# Altium PCB CR-10 Motherboard.PcbDoc (part 1 of 14)
Units mil, origin at the board's own origin, x right, y up, seen from the top; angles counter-clockwise.
Board outline 3970.48 x 2769.68 mil, 2 copper layers (TopLayer, BottomLayer); 147 components, 128 nets, 667 pads, 614 vias.
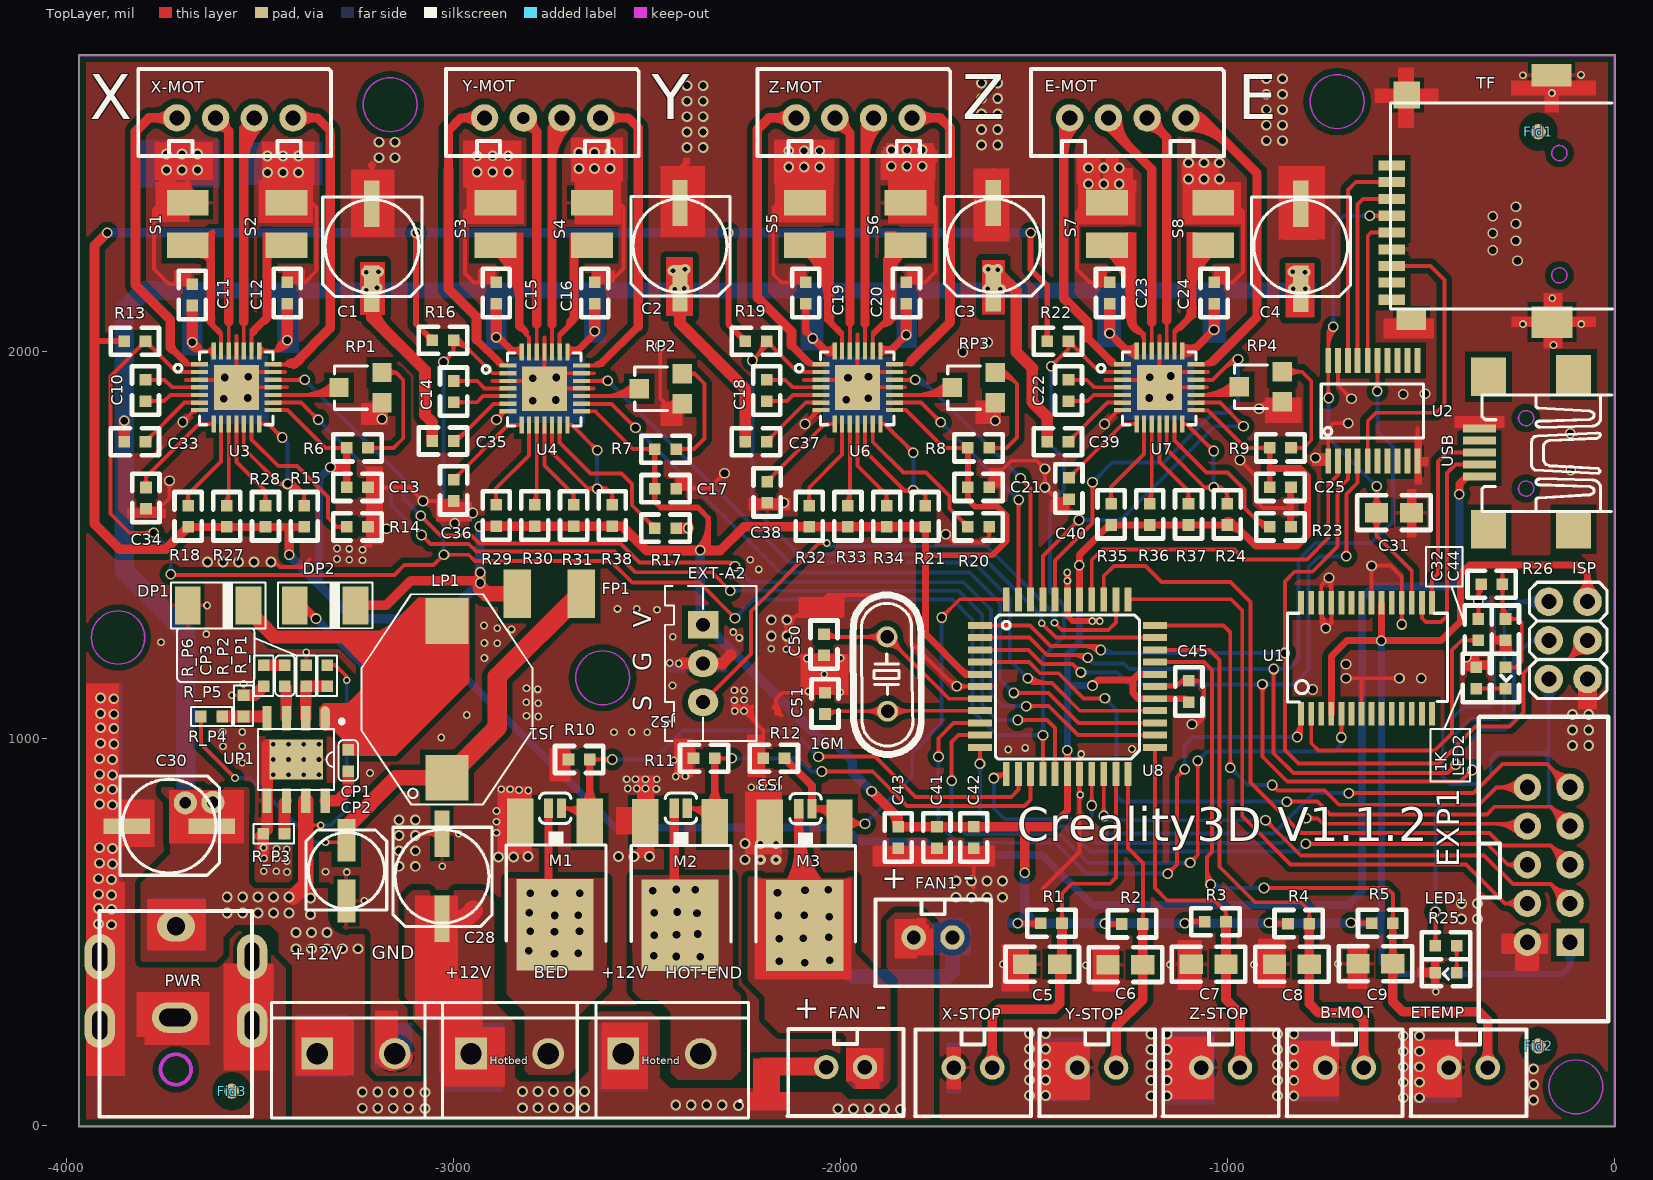
[diagram p0: TopLayer view]
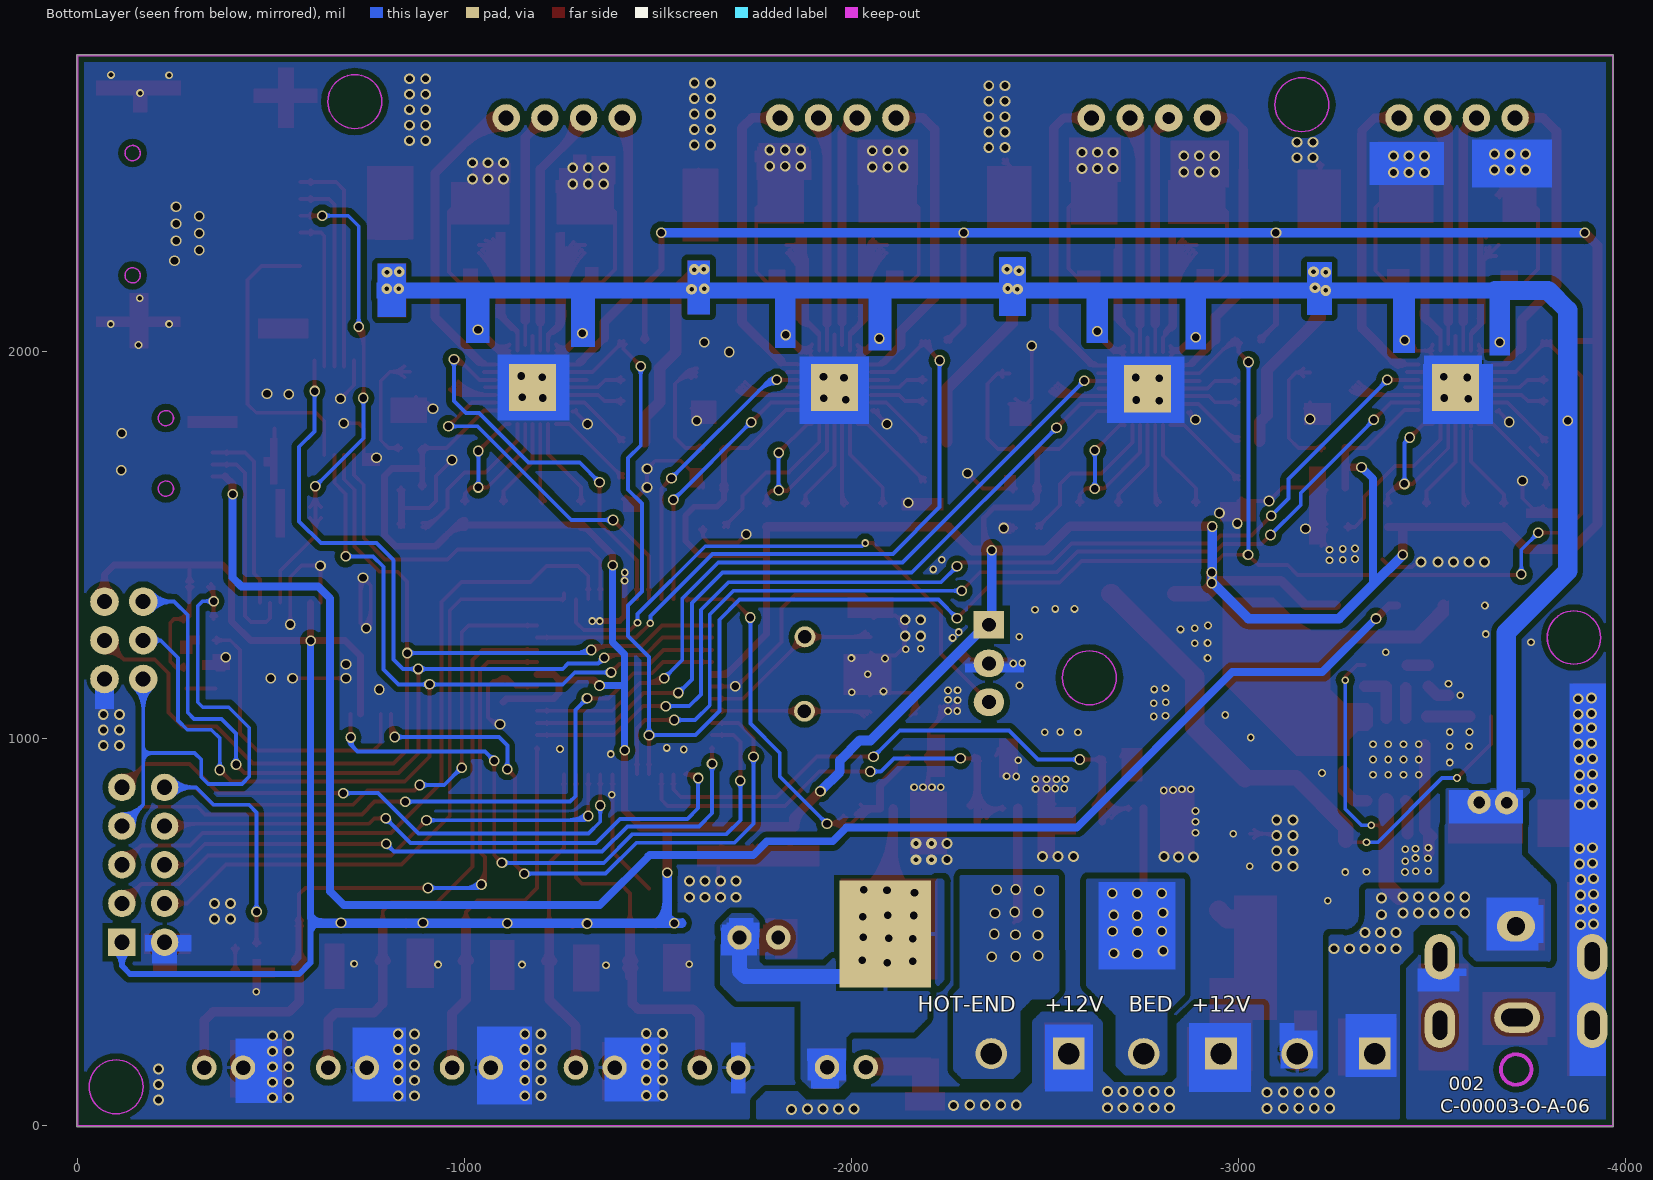
[diagram p1: BottomLayer view, seen from below]

## Layer stack, top to bottom
TopSolder: solder mask 0.4, Solder Resist, Dk 3.5
TopLayer: signal copper 1.4
Dielectric1: dielectric 12.6, FR-4, Dk 4.8
BottomLayer: signal copper 1.4
BottomSolder: solder mask 0.4, Solder Resist, Dk 3.5

## Board outline
-3968.51,-1.97 1.97,-1.97 1.97,2767.72 -3968.51,2767.72

## Design rules (kind name [scope] priority, off if disabled: settings)
Clearance Clearance_4 [InPolygon] p1: gap=15 ignorepadtopadclearanceinfootprint=FALSE except(0: Arc-Hole Track-Hole SMDPad-Hole THPad-Hole Via-Hole Fill-Hole Poly-Hole Region-Hole Text-Hole)
Clearance Clearance_3 [InPolygon vs (InPadClass('All Pads'))] p2: gap=15 ignorepadtopadclearanceinfootprint=FALSE except(0: Arc-Hole Track-Hole SMDPad-Hole THPad-Hole Via-Hole Fill-Hole Poly-Hole Region-Hole Text-Hole)
Clearance Clearance_2 [InPolygon vs OnLayer('KeepOutLayer')] p3: gap=15 ignorepadtopadclearanceinfootprint=FALSE except(0: Arc-Hole Track-Hole SMDPad-Hole THPad-Hole Via-Hole Fill-Hole Poly-Hole Region-Hole Text-Hole)
Clearance Clearance_1 [InPolygon vs (OnLayer('BottomLayer') AND OnLayer('TopLayer'))] p4: gap=15 ignorepadtopadclearanceinfootprint=FALSE except(0: Arc-Hole Track-Hole SMDPad-Hole THPad-Hole Via-Hole Fill-Hole Poly-Hole Region-Hole Text-Hole)
Clearance [All] p5: gap=6 ignorepadtopadclearanceinfootprint=FALSE except(0: Arc-Hole Track-Hole SMDPad-Hole THPad-Hole Via-Hole Fill-Hole Poly-Hole Region-Hole Text-Hole)
ComponentClearance [All] p1 off: gap=10 collisioncheckmode=3 verticalgap=10 showdistances=FALSE
FabricationTestPointUsage TestPointUsage [All] p1: valid=0 allowmultiple=FALSE
FabricationTestpoint Testpoint [All] p1: side=3 testpointundercomponent=TRUE minsize=40 maxsize=100 preferedsize=60 minholesize=20 maxholesize=40 preferedholesize=32 testpointgrid=1 allowsidetop=TRUE allowsidebottom=TRUE usegrid=TRUE gridtolerance=0.01
HoleToHoleClearance [All] p1: gap=0 allowstackedmicrovias=TRUE
MinimumSolderMaskSliver [All] p1: minsoldermaskwidth=6
PolygonConnect PolygonConnect_2 [(InNet('NetHotbed_1') OR InNet('NetHotend_1'))] p1: connectstyle=Direct reliefconductorwidth=10 reliefentries=4 polygonreliefangle="90 Angle" airgapwidth=10
PolygonConnect PolygonConnect_1 [All vs (InPadClass('All Pads'))] p2: connectstyle=Relief reliefconductorwidth=10 reliefentries=4 polygonreliefangle="90 Angle" airgapwidth=10
PolygonConnect [All] p3: connectstyle=Direct reliefconductorwidth=10 reliefentries=4 polygonreliefangle="90 Angle" airgapwidth=10
RoutingVias [All] p1: holewidth=28 width=50 viastyle="Through Hole" minholewidth=28 minwidth=50 maxholewidth=28 maxwidth=50
SilkToSilkClearance [All] p1: silktosilkclearance=0
SilkToSolderMaskClearance SilkscreenOverComponentPads [IsPad] p1: minsilkscreentomaskgap=0 clearancetoexposedcopper=TRUE
SolderMaskExpansion [All] p1: expansion=4
Width [All] p1: maxlimit=100 minlimit=6 preferedwidth=10 minimp=50.000000 maximp=50.000000 favimp=50.000000
23 further rules are at their usual default settings.

## Components (designator, comment, footprint, x,y, rotation, side; value= is the part's Value field where it differs from the comment)
1K "R1-1" 0603 -356.54,1129.84 r90 top (schematic designator 1k)
16M "16Mhz" CRY -1879.54,1263.84 r225 top
B-MOT "XH2.54-2A" P2#1 -647.54,150.84 r180 top
C1 "100uF" CAP-100 -3210.62,2382.88 r180 top
C2 "100uF" CAP-100 -2414.54,2384.84 r180 top
C3 "100uF" CAP-100 -1604.54,2384.84 r180 top
C4 "100uF" CAP-100 -810.62,2382.88 r180 top
C5 "4.7uF" 0805 -1433.54,417.84 r180 top
C6 "4.7uF" 0805 -1218.54,416.84 r180 top
C7 "4.7uF" 0805 -1003.54,417.84 r180 top
C8 "4.7uF" 0805 -788.54,417.84 r180 top
C9 "4.7uF" 0805 -572.54,418.84 r180 top
C10 "100nF" 0603 -3795.62,1927.88 r270 top
C11 "100nF" 0603 -3674.54,2174.84 r270 top
C12 "100nF" 0603 -3429.54,2124.84 r90 top
C13 "100nF" 0603 -3275.62,1649.88 r0 top
C14 "100nF" 0603 -2999.54,1924.84 r270 top
C15 "100nF" 0603 -2889.54,2179.84 r270 top
C16 "100nF" 0603 -2634.54,2124.84 r90 top
C17 "100nF" 0603 -2479.54,1646.84 r0 top
C18 "100nF" 0603 -2190.62,1927.88 r270 top
C19 "100nF" 0603 -2089.54,2179.84 r270 top
C20 "100nF" 0603 -1829.54,2124.84 r90 top
C21 "100nF" 0603 -1670.62,1649.88 r0 top
C22 "100nF" 0603 -1410.62,1927.88 r270 top
C23 "100nF" 0603 -1304.54,2179.84 r270 top
C24 "100nF" 0603 -1034.54,2124.84 r90 top
C25 "220nF" 0603 -890.62,1649.88 r0 top
C28 "100uF" CAP-100 -3029.54,754.84 r180 top
C30 "100uF" CAP-100 -3844.54,774.84 r270 top
C31 "100nF" 0805 -614.54,1584.84 r0 top
C32 "100nF" 0603 -351.54,1254.84 r90 top
C33 "100nF" 0603 -3795.62,1767.88 r180 top
C34 "100nF" 0603 -3794.45,1649.8 r270 top
C35 "100nF" 0603 -2999.54,1769.84 r180 top
C36 "100nF" 0603 -2999.54,1669.84 r270 top
C37 "100nF" 0603 -2190.62,1767.88 r180 top
C38 "100nF" 0603 -2189.54,1664.84 r270 top
C39 "100nF" 0603 -1410.62,1767.88 r180 top
C40 "220nF" 0603 -1409.45,1674.8 r270 top
C41 "1uF" 0603 -1750.54,772.84 r270 top
C42 "1uF" 0603 -1655.54,772.84 r270 top
C43 "100nF" 0603 -1850.54,772.84 r270 top
C44 "100nF" 0603 -281.54,1309.84 r270 top
C45 "330nF" 0603 -1099.54,1094.84 r90 top
C50 "22p" 0603 -2042.46,1270.91 r270 top
C51 "22p" 0603 -2039.8,1064.44 r90 top
CP1 "0.1uF" C0603 -3271.54,916.84 r90 top
CP2 "22uF" RVT4X5.5 -3276.54,659.84 r270 top
CP3 "150pF" C0603 -3435.54,1190.84 r270 top
DP1 "B340A-13-F" D-SMA -3686.54,1344.84 r0 top
DP2 "SS12" D-SMA -3410,1345 r0 top
E-MOT "XH2.54-4A" P4#1 -1407.49,2604.84 r0 top
ETEMP "XH2.54-2A" P2#1 -327.54,150.84 r180 top
EXP1 "Header 2x5" SOP10 -114.54,474.84 r90 top
EXT-A2 "XH2.54-3A" XH-3A -2355,1295 r0 top
FAN "XH2.54-2A" P2#1 -1936.54,151.84 r180 top
FAN1 "XH2.54-2A" P2#2 -1710.54,486.84 r180 top
Fid1 "Fiducial" Fiducial-A#1 -196.85,2568.9 r90 top
Fid2 "Fiducial" Fiducial-A#2 -246.54,304.84 r90 top
Fid3 "Fiducial" Fiducial-A#1 -3572.83,89.84 r90 top
FP1 "1.5A" MF-MSMF050 -2670,1375 r180 top
Hotbed "HP128-5.0-2P" MOT-2 -2754.69,186.84 r180 top locked
Hotend "HP128-5.0-2P" MOT-2 -2360.98,186.84 r180 top locked
ISP "HEADER 3X2" H6 -169.54,1154.84 r90 top
JS1 "not populated" R10 -2754.54,819.84 r180 top
JS2 "not populated" R10 -2429.54,819.84 r180 top
JS3 "not populated" R10 -2107.54,818.84 r180 top
LED1 "blue" 0603 -462.54,465.84 r0 top
LED2 "blue" 0603 -281.54,1129.84 r90 top
LP1 "功率电感-15uH/3A" DO3316P -3016.54,899.84 r90 top locked
M1 "REP30N06LE" TO-252 -2827.54,785.84 r180 top
M2 "REP30N06LE" TO-252 -2504.54,784.84 r180 top
M3 "REP30N06LE" TO-252 -2182.54,783.84 r180 top
PWR "HP128-5.0-2P" MOT-2 -3151.54,186.84 r180 top
R1 "10k" 0603 -1427.54,523.84 r180 top
R2 "10k" 0603 -1218.54,521.84 r180 top
R3 "10k" 0603 -1003.54,527.84 r180 top
R4 "4k7" 0603 -788.54,522.84 r180 top
R5 "4k7" 0603 -572.54,523.84 r180 top
R6 "23k7" 0603 -3220.62,1751.88 r180 top
R7 "23k7" 0603 -2424.54,1748.84 r180 top
R8 "33k" 0603 -1615.62,1751.88 r180 top
R9 "23k7" 0603 -835.62,1751.88 r180 top
R10 "10k" 0603 -2647.54,946.84 r180 top
R11 "10k" 0603 -2324.54,949.84 r180 top
R12 "10k" 0603 -2144.54,949.84 r180 top
R13 "100k" 0603 -3795.62,2027.88 r180 top
R14 "10k" 0603 -3275.62,1547.88 r0 top
R15 "10k" 0603 -3385.62,1602.88 r270 top
R16 "100k" 0603 -2999.54,2029.84 r180 top
R17 "10k" 0603 -2479.54,1544.84 r0 top
R18 "0R" 0603 -3685.62,1602.88 r270 top
R19 "100k" 0603 -2190.62,2027.88 r180 top
R20 "10k" 0603 -1670.62,1547.88 r0 top
R21 "10k" 0603 -1780.62,1602.88 r270 top
R22 "100k" 0603 -1410.62,2027.88 r180 top
R23 "10k" 0603 -890.62,1547.88 r0 top
R24 "10k" 0603 -1000.62,1607.88 r270 top
R25 "1k" 0603 -407.54,395.84 r180 top
R26 "1k" 0603 -344.54,1399.84 r0 top
R27 "0R" 0603 -3585.62,1602.88 r270 top
R28 "0R" 0603 -3485.62,1602.88 r270 top
R29 "0R" 0603 -2889.54,1604.84 r270 top
R30 "0R" 0603 -2789.54,1604.84 r270 top
R31 "0R" 0603 -2689.54,1604.84 r270 top
R32 "0R" 0603 -2080.62,1602.88 r270 top
R33 "0R" 0603 -1980.62,1602.88 r270 top
R34 "0R" 0603 -1880.62,1602.88 r270 top
R35 "0R" 0603 -1300.62,1607.88 r270 top
R36 "0R" 0603 -1200.62,1607.88 r270 top
R37 "0R" 0603 -1100.62,1607.88 r270 top
R38 "10k" 0603 -2589.54,1604.84 r270 top
R_P1 "100k" R0603 -3325.54,1190.84 r270 top
R_P2 "24.9k" R0603 -3380.54,1135.84 r90 top
R_P3 "100k" R0603 -3436.54,754.84 r180 top
R_P4 "210k" R0603 -3597.54,1057.84 r180 top
R_P5 "40.2k" R0603 -3542.54,1057.84 r90 top
R_P6 "100k" R0603 -3490.54,1190.84 r270 top
RP1 "10k" RP -3295.62,1907.88 r0 top
RP2 "10k" RP -2519.54,1904.84 r0 top
RP3 "10k" RP -1710.62,1907.88 r0 top
RP4 "10k" RP -969.54,1909.84 r0 top
S1 "0.1R" R100 -3684.54,2274.84 r180 top
S2 "0.1R" R100 -3429.54,2274.84 r180 top
S3 "0.1R" R100 -2889.54,2274.84 r180 top
S4 "0.1R" R100 -2639.54,2274.84 r180 top
S5 "0.1R" R100 -2089.54,2274.84 r180 top
S6 "0.1R" R100 -1829.54,2274.84 r180 top
S7 "0.1R" R100 -1309.54,2274.84 r180 top
S8 "0.1R" R100 -1034.54,2274.84 r180 top
TF "TF" TF -574.54,2134.84 r90 top
U1 "FT232RL" PL2303 -809.54,1064.84 r270 top
U2 "HC541" SSOP-20 -739.54,1734.84 r270 top
U3 "A4988" QFP28 -3655.62,1967.88 r0 top
U4 "A4988" QFP28 -2859.54,1964.84 r0 top
U6 "A4988" QFP28 -2050.62,1967.88 r0 top
U7 "A4988" QFP28 -1270.62,1967.88 r0 top
U8 "ATMEGA1284P-AU" QFP-44 -1638.54,1292.84 r180 top locked
UP1 "MP1584" SOIC8E -3406.54,946.84 r180 top
USB "mini-USB" USB -349.54,1739.84 r90 top
X-MOT "XH2.54-4A" P4#1 -3714.54,2604.84 r0 top
X-STOP "XH2.54-2A" P2#1 -1607.54,150.84 r180 top
Y-MOT "XH2.54-4A" P4#2 -2919.54,2604.84 r0 top
Y-STOP "XH2.54-2A" P2#1 -1287.54,150.84 r180 top
Z-MOT "XH2.54-4A" P4#1 -2114.54,2604.84 r0 top
Z-STOP "XH2.54-2A" P2#1 -967.54,150.84 r180 top

## Footprints (in the part's own frame and the unit in brackets; to place one, negate y for a bottom-side part, rotate by r counter-clockwise, add the part's x,y. Pads: shape width x height; smd on the part's side, far side on the other; paste and mask are expansions set on the pad)
0603 [mil]
  rect 30x30 smd: 1(0,0) 2(55,0)
  silkscreen extent -35,-35 90,35
0805 [mil]
  rect 60x50 smd: 1(0,0) 2(90,0)
  silkscreen extent -50,-45 140,45
C0603 [mil]
  rect 30x30 smd: 1(0,0) 2(55,0)
  silkscreen extent -25,-25 80,25
CAP-100 [mil]
  rect 40x120 smd: 1(0,220) 2(0,0)
  silkscreen extent -129,-17 127,240
CRY [mil]
  round 54 hole 35: 1(0,0) 2(135,137)
  silkscreen extent -101,-103 239,242
D-SMA [mm]
  rect 1.7x2.5 smd: 1(0,0) 2(4,0)
  silkscreen extent -1.1,-1.5 5.1,1.55
DO3316P [mm]
  rect 3x2.8 smd: 1(0,0) 2(10.29,0)
  silkscreen extent -1.75,-5.6 12.04,5.6
Fiducial-A#1 [mm]
  round 1 smd mask+0.75: ""(0,0)
  TopLayer pour cut-out: -1.25,0 -1.155,-0.478 -0.884,-0.884 -0.478,-1.155 0,-1.25 0,-1.25 0.478,-1.155 0.884,-0.884 1.155,-0.478 1.25,0 1.25,0 1.155,0.478 0.884,0.884 0.478,1.155 0,1.25 0,1.25 -0.478,1.155 -0.884,0.884 -1.155,0.478 -1.25,0
Fiducial-A#2 [mm]
  round 1 smd mask+0.75: ""(-2.493,-1.262)
  TopLayer pour cut-out: -3.743,-1.258 -3.648,-1.737 -3.377,-2.142 -2.972,-2.413 -2.493,-2.508 -2.493,-2.508 -2.015,-2.413 -1.61,-2.142 -1.339,-1.737 -1.243,-1.258 -1.243,-1.258 -1.339,-0.78 -1.61,-0.374 -2.015,-0.103 -2.493,-0.008 -2.493,-0.008 -2.972,-0.103 -3.377,-0.374 -3.648,-0.78 -3.743,-1.258
H6 [mil]
  round 74 hole 39: 1(200,0) 2(200,-100) 3(100,0) 4(100,-100) 5(0,0) 6(0,-100)
  silkscreen extent -50,-150 250,50
MF-MSMF050 [mm]
  rect 1.8x3.2 smd: 1(0,0) 2(4.2,0)
MOT-2 [mil]
  oval 82x80 hole 55: 1(0,0)
  rect 82x82 hole 55: 2(200,0)
  silkscreen extent -123,-132 319,166
P2#1 [mm]
  round 1.6 hole 0.95: 1(0,0) 2(2.54,0)
  silkscreen extent -2.54,-2.5 5.08,3.2
P2#2 [mm]
  round 1.6 hole 0.9: 1(0,0) 2(2.54,0)
  silkscreen extent -2.54,-2.5 5.08,3.2
P4#1 [mm]
  round 1.8 hole 0.991: 1(0,0) 2(2.54,0) 3(5.08,0) 4(7.62,0)
  silkscreen extent -2.54,-2.5 10.12,3.2
P4#2 [mm]
  round 1.8 hole 0.991: 1(0,0) 3(5.08,0) 4(7.62,0)
  round 1.8 hole 0.8: 2(2.54,0)
  silkscreen extent -2.54,-2.5 10.12,3.2
PL2303 [mil]
  rect 60x15 smd: 1(0,0) 2(0,26) 3(0,52) 4(0,78) 5(0,104) 6(0,130) 7(0,156) 8(0,182) 9(0,208) 10(0,234) 11(0,260) 12(0,286) 13(0,312) 14(0,338) 15(-287,338) 16(-287,312) 17(-287,286) 18(-287,260) 19(-287,234) 20(-287,208) 21(-287,182) 22(-287,156) 23(-287,130) 24(-287,104) 25(-287,78) 26(-287,52) 27(-287,26) 28(-287,0)
  silkscreen extent -260,-35 -31,378
QFP28 [mil]
  rect 116x116 / inner rect 116x116 / far side rect 122x122 all layers, no hole: 0(95,-60)
  rect 44x11 smd: 1(0,0) 2(0,-20) 3(0,-40) 4(0,-59) 5(0,-79) 6(0,-99) 7(0,-118) 15(190,-118) 16(190,-99) 17(190,-79) 18(190,-59) 19(190,-40) 20(190,-20) 21(190,0)
  rect 11x44 smd: 8(36,-154) 9(55,-154) 10(75,-154) 11(95,-154) 12(114,-154) 13(134,-154) 14(154,-154) 22(154,35) 23(134,35) 24(114,35) 25(95,35) 26(75,35) 27(55,35) 28(36,35)
  silkscreen extent -66,-156 189,32
QFP-44 [mil]
  rect 62x18 smd: 1(1,0) 2(1,31) 3(1,63) 4(1,94) 5(1,126) 6(1,157) 7(1,189) 8(1,220) 9(1,252) 10(1,283) 11(1,315) 23(-451,315) 24(-451,283) 25(-451,252) 26(-451,220) 27(-451,189) 28(-451,157) 29(-451,126) 30(-451,94) 31(-451,63) 32(-451,31) 33(-451,0)
  rect 18x62 smd: 12(-67,384) 13(-99,384) 14(-130,384) 15(-162,384) 16(-193,384) 17(-225,384) 18(-256,384) 19(-288,384) 20(-319,384) 21(-351,384) 22(-382,384) 34(-382,-68) 35(-351,-68) 36(-319,-68) 37(-288,-68) 38(-256,-68) 39(-225,-68) 40(-193,-68) 41(-162,-68) 42(-130,-68) 43(-99,-68) 44(-67,-68)
  silkscreen extent -411,-27 -39,345
R10 [mil]
  rect 24x50 smd: 1(-34,-1) 2(0,-1)
  silkscreen extent -58,-40 23,38
R100 [mil]
  rect 108x66 smd: 1(2,-1) 2(2,-111)
R0603 [mil]
  rect 30x30 smd: 1(0,0) 2(55,0)
  silkscreen extent -25,-25 80,25
RP [mil]
  rect 50x50 smd: 1(0,0) 2(111,-39) 3(111,39)
  silkscreen extent -12,-56 73,56
RVT4X5.5 [mm] "22uF  35V"
  rect 2.8x1.2 smd: 1(-2,0) 2(2,0)
  silkscreen extent -2.66,-2.65 2.6,2.65
SOIC8E [mm]
  rect 3.51x2.62 smd: 0(0,0)
  oval 0.61x1.6 smd: 1(-1.905,-2.7)
  rect 0.61x1.6 smd: 2(-0.635,-2.7) 3(0.635,-2.7) 4(1.905,-2.7) 5(1.905,2.7) 6(0.635,2.7) 7(-0.635,2.7) 8(-1.905,2.7)
  silkscreen extent -3.13,-2.63 2.5,2
SOP10 [mm]
  rect 1.8x1.8 hole 1: 1(0,0)
  round 1.8 hole 1: 2(0,2.8) 3(2.54,0) 4(2.54,2.8) 5(5.08,0) 6(5.08,2.8) 7(7.62,0) 8(7.62,2.8) 9(10.16,0) 10(10.16,2.8)
  silkscreen extent -5.2,-2.5 14.8,6
SSOP-20 [mil]
  rect 64x15 smd: 1(16.75,0) 2(16.75,25) 3(16.75,51) 4(16.75,76) 5(16.75,102) 6(16.75,127) 7(16.75,153) 8(16.75,179) 9(16.75,205) 10(16.75,231) 11(-242.75,231) 12(-242.75,205) 13(-242.75,179) 14(-242.75,153) 15(-242.75,127) 16(-242.75,102) 17(-242.75,76) 18(-242.75,51) 19(-242.75,25) 20(-242.75,0)
  silkscreen extent -182,-18 -43,246
TF [mil]
  rect 82x106 smd: 0(-58,-413)
  rect 52x76 smd: 0(-52,-50)
  rect 70x68 smd: 0(529,-38)
  rect 26x68 smd: 1(347,1) 2(304,1) 3(260,1) 4(217,1) 5(174,1) 6(130,1) 7(87,1) 8(44,1) 9(0,1)
  silkscreen extent -24,-569 508,4
TO-252 [mil]
  rect 68x118 smd: 1(-180,-1) 3(0,-1)
  rect 200x236 smd: 2(-90,266)
  silkscreen extent -222,25 36,309
USB [mil]
  rect 100x90 smd: 0(-198,-24) 0(-198,-244) 0(196,-24) 0(202,-244)
  rect 20x86 smd: 1(62,-1) 2(31,-1) 3(0,-1) 4(-31,-1) 5(-62,-1)
  silkscreen extent -152,-343 149,-7
XH-3A [mm]
  rect 2x1.8 hole 0.914: 1(0,0)
  oval 2x1.8 hole 0.914: 2(0,-2.54) 3(0,-5.08)
  silkscreen extent -2.5,-7.62 3.5,2.54, body extent -2.49,-7.57 3.51,2.43, height 7

## Part data
1K JS1 JS2 JS3 R1 R2 R3 R4 R5 R10 R11 R12 R25 R26 R_P1 R_P3 R_P4 R_P5 R_P6: "0603 Chip Resistor"
16M: library part Crystal, "Crystal HC49/US"
B-MOT ETEMP FAN FAN1 X-STOP Y-STOP Z-STOP: library part "Header 1x2", "Header 1x2"
C1 C2 C3 C4 C28 C30 CP2: library part "Capacitor Pol", "Capacitor Polarized"
C5 C6 C7 C8 C9 C31 C32 C41 C42 C43 C44 C45 C50 C51: "0805 Chip Capacitor"
C10 C11 C12 C13 C14 C15 C16 C17 C18 C19 C20 C21 C22 C23 C24 C25 C33 C34 C35 C36 C37 C38 C39 C40 CP1 CP3: "Chip Capacitor"
DP1 DP2: library part Diode_A1_K2, "Diode"
E-MOT X-MOT Y-MOT Z-MOT: library part "Header 1x4", "Header 1x4"
EXT-A2: library part "Header 1x3", "Header 1x3"
FP1 R6 R7 R8 R9 R13 R14 R15 R16 R17 R18 R19 R20 R21 R22 R23 R24 R27 R28 R29 R30 R31 R32 R33 R34 R35 R36 R37 R38 R_P2 S1 S2 S3 S4 S5 S6 S7 S8: "Chip Resistor"
Hotbed Hotend PWR: library part "Header 1x2", "Terminal 1x2"
ISP: library part "Header 2x3", "Header 2x3"
LED1: library part LED_A1C2, "LED"
LED2: library part LED_C1A2, "LED"
LP1: library part Inductor, "Inductor"
M1 M2 M3: library part N-FET, "N-FET"
RP1 RP2 RP3 RP4: library part RTrimm, "RTrimm"
TF: library part microSD, "microSD"
U1: "FTDI USB UART I.C."
U2: library part 74HC541, "74HC541 - Octal buffer/line driver"
U8: "AVR 8-Bit, 128k FLASH, TQFP44", Part Number=ATmega1284P-AU, PackageDescription=TQFP44
USB: library part USB, "USB"

## Free pads (board coordinates)
  oval 78.74x118.11 hole 39.37: 0(-3914.09,259.94) 0(-3914.09,437.1) 0(-3520.39,259.94) 0(-3520.39,437.1)
  oval 118.11x78.74 hole 39.37: 0(-3719.63,279.99)
  rect 102.36x59.06 smd: 0(-162.54,2714.84)
  round 39.37 hole 39.37: 1(-3914.09,241.94) 1(-3914.09,243.94) 1(-3914.09,245.94) 1(-3914.09,247.94) 1(-3914.09,249.94) 1(-3914.09,251.94) 1(-3914.09,251.94) 1(-3914.09,253.94) 1(-3914.09,255.94) 1(-3914.09,257.94) 1(-3914.09,257.94) 1(-3914.09,259.94) 1(-3914.09,259.94) 1(-3914.09,261.94) 1(-3914.09,261.94) 1(-3914.09,263.94) 1(-3914.09,265.94) 1(-3914.09,267.94) 1(-3914.09,267.94) 1(-3914.09,269.94) 1(-3914.09,271.94) 1(-3914.09,273.94) 1(-3914.09,275.94) 1(-3914.09,277.94) 1(-3914.09,419.1) 1(-3914.09,421.1) 1(-3914.09,423.1) 1(-3914.09,425.1) 1(-3914.09,427.1) 1(-3914.09,429.1) 1(-3914.09,429.1) 1(-3914.09,431.1) 1(-3914.09,433.1) 1(-3914.09,435.1) 1(-3914.09,435.1) 1(-3914.09,437.1) 1(-3914.09,437.1) 1(-3914.09,439.1) 1(-3914.09,439.1) 1(-3914.09,441.1) 1(-3914.09,443.1) 1(-3914.09,445.1) 1(-3914.09,445.1) 1(-3914.09,447.1) 1(-3914.09,449.1) 1(-3914.09,451.1) 1(-3914.09,453.1) 1(-3914.09,455.1) 1(-3520.39,241.94) 1(-3520.39,243.94) 1(-3520.39,245.94) 1(-3520.39,247.94) 1(-3520.39,249.94) 1(-3520.39,251.94) 1(-3520.39,251.94) 1(-3520.39,253.94) 1(-3520.39,255.94) 1(-3520.39,257.94) 1(-3520.39,257.94) 1(-3520.39,259.94) 1(-3520.39,259.94) 1(-3520.39,261.94) 1(-3520.39,261.94) 1(-3520.39,263.94) 1(-3520.39,265.94) 1(-3520.39,267.94) 1(-3520.39,267.94) 1(-3520.39,269.94) 1(-3520.39,271.94) 1(-3520.39,273.94) 1(-3520.39,275.94) 1(-3520.39,277.94) 1(-3520.39,419.1) 1(-3520.39,421.1) 1(-3520.39,423.1) 1(-3520.39,425.1) 1(-3520.39,427.1) 1(-3520.39,429.1) 1(-3520.39,429.1) 1(-3520.39,431.1) 1(-3520.39,433.1) 1(-3520.39,435.1) 1(-3520.39,435.1) 1(-3520.39,437.1) 1(-3520.39,437.1) 1(-3520.39,439.1) 1(-3520.39,439.1) 1(-3520.39,441.1) 1(-3520.39,443.1) 1(-3520.39,445.1) 1(-3520.39,445.1) 1(-3520.39,447.1) 1(-3520.39,449.1) 1(-3520.39,451.1) 1(-3520.39,453.1) 1(-3520.39,455.1)
  round 39.37 hole 47.24: 1(-3737.63,279.99) 1(-3735.63,279.99) 1(-3733.63,279.99) 1(-3731.63,279.99) 1(-3729.63,279.99) 1(-3727.63,279.99) 1(-3727.63,279.99) 1(-3725.63,279.99) 1(-3723.63,279.99) 1(-3721.63,279.99) 1(-3721.63,279.99) 1(-3719.63,279.99) 1(-3719.63,279.99) 1(-3717.63,279.99) 1(-3717.63,279.99) 1(-3715.63,279.99) 1(-3713.63,279.99) 1(-3711.63,279.99) 1(-3711.63,279.99) 1(-3709.63,279.99) 1(-3707.63,279.99) 1(-3705.63,279.99) 1(-3703.63,279.99) 1(-3701.63,279.99)
  rect 236.22x275.59 smd far side: 1(-2087.54,495.84)
  round 60 hole 30: 2(-3692.54,834.84) 3(-3621.54,835.84)
  oval 98.43x78.74 hole 47.24: 3(-3716.69,515.97)

## Via types
v1: diameter 28, hole 18, TopLayer to BottomLayer, tented both sides, 246 vias
v2: diameter 27.56, hole 19.68, TopLayer to BottomLayer, tented both sides, 196 vias
v3: diameter 20, hole 12, TopLayer to BottomLayer, tented both sides, 124 vias
v4: diameter 27.56, hole 11.81, TopLayer to BottomLayer, tented bottom, 16 vias
v5: diameter 27.56, hole 19.68, TopLayer to BottomLayer, 16 vias
v6: diameter 20, hole 12, TopLayer to BottomLayer, 12 vias
v7: diameter 28, hole 11.81, TopLayer to BottomLayer, tented both sides, 4 vias

## Nets (pads, with @x,y where several pads share a name; then routed paths per layer and width w, separated by ;. In a path a pad name is that pad's centre, name@x,y a point inside that pad or via, vN(x,y) a via of type N, cw(c..) or ccw(c..) an arc to the next point about the centre after c; other vN are vias at no path point)
AIFO: U1.1 U8.9 | length 2743.2
  TopLayer w10: v2(-1746.54,953.84) -1746.54,1001.84 -1707.54,1040.84 U8.9@-1639.54,1040.84 ; v2(-1154.54,651.84) -1130.54,675.84 -1130.54,901.84 v2(-1110.54,921.84) ; v2@-825.74,1011.05 ccw(c-864.87,1050.18) U1.1@-809.54,1050.18 ; v2(-819.54,1004.84) -809.54,1014.84 ; v2@-818.67,1003.98 ccw(c-840.73,1026.04) -809.54,1026.04 ; v2@-816.73,1013.16 ccw(c-814.49,1019.79) -809.54,1014.84 ; v2@-811.22,1007.65 cw(c-804.59,1009.89) -809.54,1014.84 ; U1.1@-809.54,1064.84 -809.54,1014.84 ; v2@-1752.74,960.05 ccw(c-1767.73,975.04) -1746.54,975.04 ; v2@-1752.74,960.05 ccw(c-1767.73,975.04) -1746.54,975.04 ; v2@-1752.74,960.05 ccw(c-1767.73,975.04) -1746.54,975.04 ; v2@-1752.74,960.05 ccw(c-1767.73,975.04) -1746.54,975.04 ; v2@-1752.74,960.05 ccw(c-1767.73,975.04) -1746.54,975.04 ; v2@-1752.74,960.05 ccw(c-1767.73,975.04) -1746.54,975.04 ; v2@-1752.74,960.05 ccw(c-1767.73,975.04) -1746.54,975.04 ; v2@-1752.74,960.05 ccw(c-1767.73,975.04) -1746.54,975.04 ; v2@-1752.74,960.05 ccw(c-1767.73,975.04) -1746.54,975.04 ; -1746.54,975.04 ccw(c-1725.34,975.04) v2@-1740.33,960.05 ; -1746.54,975.04 ccw(c-1725.34,975.04) v2@-1740.33,960.05 ; -1746.54,975.04 ccw(c-1725.34,975.04) v2@-1740.33,960.05 ; -1746.54,975.04 ccw(c-1725.34,975.04) v2@-1740.33,960.05 ; -1746.54,975.04 ccw(c-1725.34,975.04) v2@-1740.33,960.05 ; -1746.54,975.04 ccw(c-1725.34,975.04) v2@-1740.33,960.05 ; -1746.54,975.04 ccw(c-1725.34,975.04) v2@-1740.33,960.05 ; -1746.54,975.04 ccw(c-1725.34,975.04) v2@-1740.33,960.05 ; -1746.54,975.04 ccw(c-1725.34,975.04) v2@-1740.33,960.05 ; -1671.19,1040.84 cw(c-1671.19,1031.19) U8.9@-1664.36,1038.01 ; -1671.19,1040.84 ccw(c-1671.19,1050.5) U8.9@-1664.36,1043.67 ; -1671.19,1040.84 cw(c-1671.19,1031.19) U8.9@-1664.36,1038.01 ; -1671.19,1040.84 ccw(c-1671.19,1050.5) U8.9@-1664.36,1043.67 ; -1671.19,1040.84 cw(c-1671.19,1031.19) U8.9@-1664.36,1038.01 ; -1671.19,1040.84 ccw(c-1671.19,1050.5) U8.9@-1664.36,1043.67 ; -1671.19,1040.84 ccw(c-1671.19,1050.5) U8.9@-1664.36,1043.67 ; -1671.19,1040.84 cw(c-1671.19,1031.19) U8.9@-1664.36,1038.01 ; -1671.19,1040.84 ccw(c-1671.19,1050.5) U8.9@-1664.36,1043.67 ; -1671.19,1040.84 cw(c-1671.19,1031.19) U8.9@-1664.36,1038.01 ; -1671.19,1040.84 ccw(c-1671.19,1050.5) U8.9@-1664.36,1043.67 ; -1671.19,1040.84 cw(c-1671.19,1031.19) U8.9@-1664.36,1038.01 ; -1139.55,666.83 cw(c-1154.54,681.82) -1154.54,660.62 ccw(c-1154.54,681.82) -1139.55,666.83 ; -1139.55,666.83 ccw(c-1124.56,651.84) -1145.76,651.84 cw(c-1124.56,651.84) -1139.55,666.83 ; -1125.52,906.85 cw(c-1110.54,891.87) -1110.54,913.06 ccw(c-1110.54,891.87) -1125.52,906.85 ; -1125.52,906.85 ccw(c-1140.51,921.84) -1119.31,921.84 cw(c-1140.51,921.84) -1125.52,906.85
  BottomLayer w10: v2(-1746.54,953.84) -1746.54,780.84 -1697.54,731.84 -1444.54,731.84 -1364.54,651.84 v2(-1154.54,651.84) ; v2@-1116.74,928.05 ccw(c-1131.73,943.04) -1110.54,943.04 ccw(c-1089.34,943.04) v2@-1104.33,928.05 ; v2(-1110.54,921.84) -1110.54,982.84 -1088.54,1004.84 v2(-819.54,1004.84) ; v2@-825.74,998.63 ccw(c-840.73,983.65) -840.73,1004.84 ccw(c-840.73,1026.04) v2@-825.74,1011.05 ; v2@-1752.74,947.63 cw(c-1767.73,932.65) -1746.54,932.65 ; v2@-1752.74,947.63 cw(c-1767.73,932.65) -1746.54,932.65 ; v2@-1752.74,947.63 cw(c-1767.73,932.65) -1746.54,932.65 ; v2@-1752.74,947.63 cw(c-1767.73,932.65) -1746.54,932.65 ; v2@-1752.74,947.63 cw(c-1767.73,932.65) -1746.54,932.65 ; v2@-1752.74,947.63 cw(c-1767.73,932.65) -1746.54,932.65 ; v2@-1752.74,947.63 cw(c-1767.73,932.65) -1746.54,932.65 ; v2@-1752.74,947.63 cw(c-1767.73,932.65) -1746.54,932.65 ; v2@-1752.74,947.63 cw(c-1767.73,932.65) -1746.54,932.65 ; -1746.54,932.65 cw(c-1725.34,932.65) v2@-1740.33,947.63 ; -1746.54,932.65 cw(c-1725.34,932.65) v2@-1740.33,947.63 ; -1746.54,932.65 cw(c-1725.34,932.65) v2@-1740.33,947.63 ; -1746.54,932.65 cw(c-1725.34,932.65) v2@-1740.33,947.63 ; -1746.54,932.65 cw(c-1725.34,932.65) v2@-1740.33,947.63 ; -1746.54,932.65 cw(c-1725.34,932.65) v2@-1740.33,947.63 ; -1746.54,932.65 cw(c-1725.34,932.65) v2@-1740.33,947.63 ; -1746.54,932.65 cw(c-1725.34,932.65) v2@-1740.33,947.63 ; -1746.54,932.65 cw(c-1725.34,932.65) v2@-1740.33,947.63 ; -1175.73,651.84 cw(c-1175.73,630.65) -1160.74,645.63 ccw(c-1175.73,630.65) -1175.73,651.84 ; -1175.73,651.84 ccw(c-1175.73,673.04) -1160.74,658.05 cw(c-1175.73,673.04) -1175.73,651.84
AOFI: U1.5 U8.10 | length 2700.5
  TopLayer w10: v2(-1712.54,891.84) -1712.54,991.84 -1694.54,1009.84 U8.10@-1639.54,1009.84 ; v2(-1096.54,679.84) -1076.54,699.84 v2(-1076.54,943.84) ; v2@-1096.54,688.62 ccw(c-1096.54,709.82) -1081.55,694.83 ccw(c-1066.56,679.84) v2@-1087.76,679.84 ; v2@-1095.05,688.5 ccw(c-1093.03,700.33) -1084.54,691.84 ccw(c-1076.04,683.35) v2@-1087.88,681.32 ; v2@-1082.74,937.63 cw(c-1097.73,922.65) -1076.54,922.65 cw(c-1055.34,922.65) v2@-1070.33,937.63 ; v2(-705.54,1003.84) U1.5@-705.54,1064.84 ; v2@-1718.74,898.05 ccw(c-1733.73,913.04) -1712.54,913.04 ; v2@-1718.74,898.05 ccw(c-1733.73,913.04) -1712.54,913.04 ; v2@-1718.74,898.05 ccw(c-1733.73,913.04) -1712.54,913.04 ; v2@-1718.74,898.05 ccw(c-1733.73,913.04) -1712.54,913.04 ; v2@-1718.74,898.05 ccw(c-1733.73,913.04) -1712.54,913.04 ; v2@-1718.74,898.05 ccw(c-1733.73,913.04) -1712.54,913.04 ; v2@-1718.74,898.05 ccw(c-1733.73,913.04) -1712.54,913.04 ; v2@-1718.74,898.05 ccw(c-1733.73,913.04) -1712.54,913.04 ; v2@-1718.74,898.05 ccw(c-1733.73,913.04) -1712.54,913.04 ; -1712.54,913.04 ccw(c-1691.34,913.04) v2@-1706.33,898.05 ; -1712.54,913.04 ccw(c-1691.34,913.04) v2@-1706.33,898.05 ; -1712.54,913.04 ccw(c-1691.34,913.04) v2@-1706.33,898.05 ; -1712.54,913.04 ccw(c-1691.34,913.04) v2@-1706.33,898.05 ; -1712.54,913.04 ccw(c-1691.34,913.04) v2@-1706.33,898.05 ; -1712.54,913.04 ccw(c-1691.34,913.04) v2@-1706.33,898.05 ; -1712.54,913.04 ccw(c-1691.34,913.04) v2@-1706.33,898.05 ; -1712.54,913.04 ccw(c-1691.34,913.04) v2@-1706.33,898.05 ; -1712.54,913.04 ccw(c-1691.34,913.04) v2@-1706.33,898.05 ; -1671.19,1009.84 cw(c-1671.19,1000.19) U8.10@-1664.36,1007.01 ; -1671.19,1009.84 ccw(c-1671.19,1019.5) U8.10@-1664.36,1012.67 ; -1671.19,1009.84 cw(c-1671.19,1000.19) U8.10@-1664.36,1007.01 ; -1671.19,1009.84 ccw(c-1671.19,1019.5) U8.10@-1664.36,1012.67 ; -1671.19,1009.84 cw(c-1671.19,1000.19) U8.10@-1664.36,1007.01 ; -1671.19,1009.84 ccw(c-1671.19,1019.5) U8.10@-1664.36,1012.67 ; -1671.19,1009.84 ccw(c-1671.19,1019.5) U8.10@-1664.36,1012.67 ; -1671.19,1009.84 cw(c-1671.19,1000.19) U8.10@-1664.36,1007.01 ; -1671.19,1009.84 ccw(c-1671.19,1019.5) U8.10@-1664.36,1012.67 ; -1671.19,1009.84 cw(c-1671.19,1000.19) U8.10@-1664.36,1007.01 ; -1671.19,1009.84 ccw(c-1671.19,1019.5) U8.10@-1664.36,1012.67 ; -1671.19,1009.84 cw(c-1671.19,1000.19) U8.10@-1664.36,1007.01 ; -705.54,1025.04 cw(c-726.73,1025.04) -711.74,1010.05 ccw(c-726.73,1025.04) -705.54,1025.04 ; -705.54,1025.04 ccw(c-684.34,1025.04) -699.33,1010.05 cw(c-684.34,1025.04) -705.54,1025.04
  BottomLayer w10: v2(-1712.54,891.84) -1712.54,789.84 -1676.54,753.84 -1433.54,753.84 -1359.54,679.84 v2(-1096.54,679.84) ; v2(-1076.54,943.84) -1052.54,967.84 -723.54,967.84 -705.54,985.84 ; v2@-1076.54,952.62 ccw(c-1076.54,973.82) -1061.55,958.83 ccw(c-1046.56,943.84) v2@-1067.76,943.84 ; -714.53,976.84 ccw(c-726.58,988.89) v2@-712.69,998.76 ; v2@-710.94,996.92 cw(c-719.6,985.84) -705.54,985.84 ; -706.17,985.21 ccw(c-716.8,995.84) v2@-704.54,1004.55 ; v2(-705.54,1003.84) -705.54,985.84 ; v2@-700.13,996.92 ccw(c-691.48,985.84) -705.54,985.84 ; v2@-1718.74,885.63 cw(c-1733.73,870.65) -1712.54,870.65 ; v2@-1718.74,885.63 cw(c-1733.73,870.65) -1712.54,870.65 ; v2@-1718.74,885.63 cw(c-1733.73,870.65) -1712.54,870.65 ; v2@-1718.74,885.63 cw(c-1733.73,870.65) -1712.54,870.65 ; v2@-1718.74,885.63 cw(c-1733.73,870.65) -1712.54,870.65 ; v2@-1718.74,885.63 cw(c-1733.73,870.65) -1712.54,870.65 ; v2@-1718.74,885.63 cw(c-1733.73,870.65) -1712.54,870.65 ; v2@-1718.74,885.63 cw(c-1733.73,870.65) -1712.54,870.65 ; v2@-1718.74,885.63 cw(c-1733.73,870.65) -1712.54,870.65 ; -1712.54,870.65 cw(c-1691.34,870.65) v2@-1706.33,885.63 ; -1712.54,870.65 cw(c-1691.34,870.65) v2@-1706.33,885.63 ; -1712.54,870.65 cw(c-1691.34,870.65) v2@-1706.33,885.63 ; -1712.54,870.65 cw(c-1691.34,870.65) v2@-1706.33,885.63 ; -1712.54,870.65 cw(c-1691.34,870.65) v2@-1706.33,885.63 ; -1712.54,870.65 cw(c-1691.34,870.65) v2@-1706.33,885.63 ; -1712.54,870.65 cw(c-1691.34,870.65) v2@-1706.33,885.63 ; -1712.54,870.65 cw(c-1691.34,870.65) v2@-1706.33,885.63 ; -1712.54,870.65 cw(c-1691.34,870.65) v2@-1706.33,885.63 ; -1117.73,679.84 cw(c-1117.73,658.65) -1102.74,673.63 ccw(c-1117.73,658.65) -1117.73,679.84 ; -1117.73,679.84 ccw(c-1117.73,701.04) -1102.74,686.05 cw(c-1117.73,701.04) -1117.73,679.84
BEDTEMP: B-MOT.1 C8.1 R4.1 U8.31 | length 2581.1
  TopLayer w10: U8.31@-1187.54,1229.84 -1046.54,1229.84 -1020.54,1203.84 -1020.54,669.84 -928.54,577.84 -810.54,577.84 -788.54,555.84 R4.1@-788.54,522.84 ; C8.1@-802.68,431.98 ccw(c-836.82,466.13) -788.54,466.13 ; -1155.88,1229.84 cw(c-1155.88,1239.5) -1162.71,1232.67 ccw(c-1155.88,1239.5) -1155.88,1229.84 ; -1155.88,1229.84 ccw(c-1155.88,1220.19) -1162.71,1227.01 cw(c-1155.88,1220.19) -1155.88,1229.84 ; R4.1@-795.61,529.91 ccw(c-812.68,546.98) -788.54,546.98 ; R4.1@-795.61,529.91 ccw(c-812.68,546.98) -788.54,546.98 ; R4.1@-795.61,529.91 ccw(c-812.68,546.98) -788.54,546.98 ; R4.1@-795.61,529.91 ccw(c-812.68,546.98) -788.54,546.98 ; R4.1@-795.61,529.91 ccw(c-812.68,546.98) -788.54,546.98 ; R4.1@-795.61,529.91 ccw(c-812.68,546.98) -788.54,546.98 ; -788.54,546.98 ccw(c-764.39,546.98) R4.1@-781.46,529.91 ; -788.54,546.98 ccw(c-764.39,546.98) R4.1@-781.46,529.91 ; -788.54,546.98 ccw(c-764.39,546.98) R4.1@-781.46,529.91 ; -788.54,546.98 ccw(c-764.39,546.98) R4.1@-781.46,529.91 ; -788.54,546.98 ccw(c-764.39,546.98) R4.1@-781.46,529.91 ; -788.54,546.98 ccw(c-764.39,546.98) R4.1@-781.46,529.91
  TopLayer w20: C8.1@-799.14,428.45 ccw(c-824.75,454.06) -788.54,454.06 cw(c-824.75,454.06) C8.1@-799.14,428.45
  TopLayer w25: R4.1@-788.54,522.84 C8.1@-788.54,417.84 -788.54,370.84 -788.54,315.84 -765.54,292.84 -667.54,292.84 -647.54,272.84 B-MOT.1@-647.54,150.84 ; C8.1@-797.37,426.68 ccw(c-818.71,448.02) -788.54,448.02 ; C8.1@-797.37,426.68 ccw(c-818.71,448.02) -788.54,448.02 ; C8.1@-797.37,426.68 ccw(c-818.71,448.02) -788.54,448.02 ; C8.1@-797.37,426.68 ccw(c-818.71,448.02) -788.54,448.02 ; C8.1@-797.37,426.68 ccw(c-818.71,448.02) -788.54,448.02 ; C8.1@-797.37,426.68 ccw(c-818.71,448.02) -788.54,448.02 ; -788.54,448.02 ccw(c-758.36,448.02) C8.1@-779.7,426.68 ; -788.54,448.02 ccw(c-758.36,448.02) C8.1@-779.7,426.68 ; -788.54,448.02 ccw(c-758.36,448.02) C8.1@-779.7,426.68 ; -788.54,448.02 ccw(c-758.36,448.02) C8.1@-779.7,426.68 ; -788.54,448.02 ccw(c-758.36,448.02) C8.1@-779.7,426.68 ; -788.54,448.02 ccw(c-758.36,448.02) C8.1@-779.7,426.68 ; B-MOT.1@-660.97,164.27 ccw(c-693.4,196.7) -647.54,196.7 ; B-MOT.1@-660.97,164.27 ccw(c-693.4,196.7) -647.54,196.7 ; B-MOT.1@-660.97,164.27 ccw(c-693.4,196.7) -647.54,196.7 ; B-MOT.1@-660.97,164.27 ccw(c-693.4,196.7) -647.54,196.7 ; B-MOT.1@-660.97,164.27 ccw(c-693.4,196.7) -647.54,196.7 ; B-MOT.1@-660.97,164.27 ccw(c-693.4,196.7) -647.54,196.7 ; -647.54,196.7 ccw(c-601.67,196.7) B-MOT.1@-634.1,164.27 ; -647.54,196.7 ccw(c-601.67,196.7) B-MOT.1@-634.1,164.27 ; -647.54,196.7 ccw(c-601.67,196.7) B-MOT.1@-634.1,164.27 ; -647.54,196.7 ccw(c-601.67,196.7) B-MOT.1@-634.1,164.27 ; -647.54,196.7 ccw(c-601.67,196.7) B-MOT.1@-634.1,164.27 ; -647.54,196.7 ccw(c-601.67,196.7) B-MOT.1@-634.1,164.27
Beeper: EXP1.10 LED1.1 U8.33 | length 2636.8
  TopLayer w10: U8.33@-1187.54,1292.84 -1010.54,1292.84 -992.54,1274.84 v2(-992.54,925.84) ; v2@-998.74,932.05 ccw(c-1013.73,947.04) -992.54,947.04 ccw(c-971.34,947.04) v2@-986.33,932.05 ; v2(-884.54,880.84) -870.54,866.84 ; v2@-884.1,872.07 cw(c-883.22,854.16) -870.54,866.84 ; v2@-875.77,880.41 ccw(c-857.86,879.52) -870.54,866.84 ; LED1.1@-469.61,472.91 ccw(c-486.68,489.98) -462.54,489.98 ccw(c-438.39,489.98) LED1.1@-455.46,472.91 ; v2@-468.74,547.63 cw(c-483.73,532.65) -462.54,532.65 cw(c-441.34,532.65) v2@-456.33,547.63 ; LED1.1@-462.54,465.84 v2(-462.54,553.84) ; EXP1.10@-246.29,853.32 ccw(c-298.24,801.37) -298.24,874.84 ccw(c-298.24,948.31) EXP1.10@-246.29,896.36 ; EXP1.10@-239.22,860.39 ccw(c-274.1,825.51) -274.1,874.84 ccw(c-274.1,924.17) EXP1.10@-239.22,889.29 ; EXP1.10@-224.77,874.84 -304.54,874.84 -349.54,829.84 -711.54,829.84 -748.54,866.84 -870.54,866.84 ; -1155.88,1292.84 cw(c-1155.88,1302.5) -1162.71,1295.67 ccw(c-1155.88,1302.5) -1155.88,1292.84 ; -1155.88,1292.84 ccw(c-1155.88,1283.19) -1162.71,1290.01 cw(c-1155.88,1283.19) -1155.88,1292.84
  BottomLayer w10: v2@-992.54,917.06 cw(c-992.54,895.87) -977.55,910.85 cw(c-962.56,925.84) v2@-983.76,925.84 ; v2(-992.54,925.84) -947.54,880.84 v2(-884.54,880.84) ; v2@-890.74,874.63 ccw(c-905.73,859.65) -905.73,880.84 ccw(c-905.73,902.04) v2@-890.74,887.05 ; v2@-468.74,560.05 ccw(c-483.73,575.04) -462.54,575.04 ccw(c-441.34,575.04) v2@-456.33,560.05 ; v2(-462.54,553.84) -462.54,809.84 -442.54,829.84 -351.54,829.84 -306.54,874.84 EXP1.10@-224.77,874.84 ; EXP1.10@-246.29,853.32 ccw(c-298.24,801.37) -298.24,874.84 ccw(c-298.24,948.31) EXP1.10@-246.29,896.36 ; EXP1.10@-239.22,860.39 ccw(c-274.1,825.51) -274.1,874.84 ccw(c-274.1,924.17) EXP1.10@-239.22,889.29
DIR: C32.1 U1.2 | length 835.9
  TopLayer w10: U1.2@-783.54,1064.84 -783.54,988.84 -764.54,969.84 -464.2,969.84 -419.54,1014.5 -419.54,1229.84 -394.54,1254.84 C32.1@-351.54,1254.84 ; -375.68,1254.84 cw(c-375.68,1230.7) -358.61,1247.77 ccw(c-375.68,1230.7) -375.68,1254.84 ; -375.68,1254.84 ccw(c-375.68,1278.98) -358.61,1261.91 cw(c-375.68,1278.98) -375.68,1254.84
E-DIR: U7.19 U8.40 | length 2605.8
  TopLayer w10: U8.40@-1445.54,1360.84 -1445.54,1460.84 -1348.54,1557.84 v2(-1348.54,1662.84) ; U7.19@-1080.62,1927.88 -1038.5,1927.88 -985.54,1980.84 v2(-972.54,1980.84) ; U8.40@-1448.36,1385.67 ccw(c-1455.19,1392.5) -1445.54,1392.5 ; U8.40@-1448.36,1385.67 ccw(c-1455.19,1392.5) -1445.54,1392.5 ; U8.40@-1448.36,1385.67 ccw(c-1455.19,1392.5) -1445.54,1392.5 ; U8.40@-1448.36,1385.67 ccw(c-1455.19,1392.5) -1445.54,1392.5 ; U8.40@-1448.36,1385.67 ccw(c-1455.19,1392.5) -1445.54,1392.5 ; U8.40@-1448.36,1385.67 ccw(c-1455.19,1392.5) -1445.54,1392.5 ; -1445.54,1392.5 ccw(c-1435.88,1392.5) U8.40@-1442.71,1385.67 ; -1445.54,1392.5 ccw(c-1435.88,1392.5) U8.40@-1442.71,1385.67 ; -1445.54,1392.5 ccw(c-1435.88,1392.5) U8.40@-1442.71,1385.67 ; -1445.54,1392.5 ccw(c-1435.88,1392.5) U8.40@-1442.71,1385.67 ; -1445.54,1392.5 ccw(c-1435.88,1392.5) U8.40@-1442.71,1385.67 ; -1445.54,1392.5 ccw(c-1435.88,1392.5) U8.40@-1442.71,1385.67 ; v2@-1354.74,1656.63 cw(c-1369.73,1641.65) -1348.54,1641.65 ; v2@-1354.74,1656.63 cw(c-1369.73,1641.65) -1348.54,1641.65 ; v2@-1354.74,1656.63 cw(c-1369.73,1641.65) -1348.54,1641.65 ; v2@-1354.74,1656.63 cw(c-1369.73,1641.65) -1348.54,1641.65 ; v2@-1354.74,1656.63 cw(c-1369.73,1641.65) -1348.54,1641.65 ; v2@-1354.74,1656.63 cw(c-1369.73,1641.65) -1348.54,1641.65 ; v2@-1354.74,1656.63 cw(c-1369.73,1641.65) -1348.54,1641.65 ; v2@-1354.74,1656.63 cw(c-1369.73,1641.65) -1348.54,1641.65 ; v2@-1354.74,1656.63 cw(c-1369.73,1641.65) -1348.54,1641.65 ; -1348.54,1641.65 cw(c-1327.34,1641.65) v2@-1342.33,1656.63 ; -1348.54,1641.65 cw(c-1327.34,1641.65) v2@-1342.33,1656.63 ; -1348.54,1641.65 cw(c-1327.34,1641.65) v2@-1342.33,1656.63 ; -1348.54,1641.65 cw(c-1327.34,1641.65) v2@-1342.33,1656.63 ; -1348.54,1641.65 cw(c-1327.34,1641.65) v2@-1342.33,1656.63 ; -1348.54,1641.65 cw(c-1327.34,1641.65) v2@-1342.33,1656.63 ; -1348.54,1641.65 cw(c-1327.34,1641.65) v2@-1342.33,1656.63 ; -1348.54,1641.65 cw(c-1327.34,1641.65) v2@-1342.33,1656.63 ; -1348.54,1641.65 cw(c-1327.34,1641.65) v2@-1342.33,1656.63 ; -1009.72,1956.66 cw(c-972.54,1919.48) v2@-972.54,1972.06 ; -1009.72,1956.66 cw(c-972.54,1919.48) v2@-972.54,1972.06 ; -1009.72,1956.66 cw(c-972.54,1919.48) v2@-972.54,1972.06 ; -1009.72,1956.66 cw(c-972.54,1919.48) v2@-972.54,1972.06 ; -1009.72,1956.66 cw(c-972.54,1919.48) v2@-972.54,1972.06 ; -1009.72,1956.66 cw(c-972.54,1919.48) v2@-972.54,1972.06 ; -1009.72,1956.66 cw(c-972.54,1919.48) v2@-972.54,1972.06 ; -1009.72,1956.66 cw(c-972.54,1919.48) v2@-972.54,1972.06 ; -1009.72,1956.66 cw(c-972.54,1919.48) v2@-972.54,1972.06 ; -992.64,1973.73 cw(c-972.54,1953.62) v2@-972.54,1982.06 ; -992.64,1973.73 cw(c-972.54,1953.62) v2@-972.54,1982.06 ; -992.64,1973.73 cw(c-972.54,1953.62) v2@-972.54,1982.06 ; -992.64,1973.73 cw(c-972.54,1953.62) v2@-972.54,1982.06 ; -992.64,1973.73 cw(c-972.54,1953.62) v2@-972.54,1982.06 ; -992.64,1973.73 cw(c-972.54,1953.62) v2@-972.54,1982.06 ; -992.64,1973.73 cw(c-972.54,1953.62) v2@-972.54,1982.06 ; -992.64,1973.73 cw(c-972.54,1953.62) v2@-972.54,1982.06 ; -992.64,1973.73 cw(c-972.54,1953.62) v2@-972.54,1982.06
  BottomLayer w10: v2(-1348.54,1662.84) -1297.54,1713.84 -1165.54,1713.84 -1037.54,1841.84 -1003.54,1841.84 -972.54,1872.84 v2(-972.54,1980.84) ; v2@-1348.54,1671.62 ccw(c-1348.54,1692.82) -1333.55,1677.83 ; v2@-1348.54,1671.62 ccw(c-1348.54,1692.82) -1333.55,1677.83 ; v2@-1348.54,1671.62 ccw(c-1348.54,1692.82) -1333.55,1677.83 ; v2@-1348.54,1671.62 ccw(c-1348.54,1692.82) -1333.55,1677.83 ; v2@-1348.54,1671.62 ccw(c-1348.54,1692.82) -1333.55,1677.83 ; v2@-1348.54,1671.62 ccw(c-1348.54,1692.82) -1333.55,1677.83 ; v2@-1348.54,1671.62 ccw(c-1348.54,1692.82) -1333.55,1677.83 ; v2@-1348.54,1671.62 ccw(c-1348.54,1692.82) -1333.55,1677.83 ; v2@-1348.54,1671.62 ccw(c-1348.54,1692.82) -1333.55,1677.83 ; v2@-1339.76,1662.84 cw(c-1318.56,1662.84) -1333.55,1677.83 ; v2@-1339.76,1662.84 cw(c-1318.56,1662.84) -1333.55,1677.83 ; v2@-1339.76,1662.84 cw(c-1318.56,1662.84) -1333.55,1677.83 ; v2@-1339.76,1662.84 cw(c-1318.56,1662.84) -1333.55,1677.83 ; v2@-1339.76,1662.84 cw(c-1318.56,1662.84) -1333.55,1677.83 ; v2@-1339.76,1662.84 cw(c-1318.56,1662.84) -1333.55,1677.83 ; v2@-1339.76,1662.84 cw(c-1318.56,1662.84) -1333.55,1677.83 ; v2@-1339.76,1662.84 cw(c-1318.56,1662.84) -1333.55,1677.83 ; v2@-1339.76,1662.84 cw(c-1318.56,1662.84) -1333.55,1677.83 ; v2@-978.74,1974.63 cw(c-993.73,1959.65) -972.54,1959.65 ; v2@-978.74,1974.63 cw(c-993.73,1959.65) -972.54,1959.65 ; v2@-978.74,1974.63 cw(c-993.73,1959.65) -972.54,1959.65 ; v2@-978.74,1974.63 cw(c-993.73,1959.65) -972.54,1959.65 ; v2@-978.74,1974.63 cw(c-993.73,1959.65) -972.54,1959.65 ; v2@-978.74,1974.63 cw(c-993.73,1959.65) -972.54,1959.65 ; v2@-978.74,1974.63 cw(c-993.73,1959.65) -972.54,1959.65 ; v2@-978.74,1974.63 cw(c-993.73,1959.65) -972.54,1959.65 ; v2@-978.74,1974.63 cw(c-993.73,1959.65) -972.54,1959.65 ; -972.54,1959.65 cw(c-951.34,1959.65) v2@-966.33,1974.63 ; -972.54,1959.65 cw(c-951.34,1959.65) v2@-966.33,1974.63 ; -972.54,1959.65 cw(c-951.34,1959.65) v2@-966.33,1974.63 ; -972.54,1959.65 cw(c-951.34,1959.65) v2@-966.33,1974.63 ; -972.54,1959.65 cw(c-951.34,1959.65) v2@-966.33,1974.63 ; -972.54,1959.65 cw(c-951.34,1959.65) v2@-966.33,1974.63 ; -972.54,1959.65 cw(c-951.34,1959.65) v2@-966.33,1974.63 ; -972.54,1959.65 cw(c-951.34,1959.65) v2@-966.33,1974.63 ; -972.54,1959.65 cw(c-951.34,1959.65) v2@-966.33,1974.63
E-STEP: U7.16 U8.41 | length 2105.8
  TopLayer w10: U8.41@-1476.54,1360.84 -1476.54,1472.84 v2(-1383.54,1565.84) ; U7.16@-1080.62,1868.88 -1019.57,1868.88 v2(-958.54,1807.84) ; U8.41@-1479.36,1385.67 ccw(c-1486.19,1392.5) -1476.54,1392.5 ; U8.41@-1479.36,1385.67 ccw(c-1486.19,1392.5) -1476.54,1392.5 ; U8.41@-1479.36,1385.67 ccw(c-1486.19,1392.5) -1476.54,1392.5 ; U8.41@-1479.36,1385.67 ccw(c-1486.19,1392.5) -1476.54,1392.5 ; U8.41@-1479.36,1385.67 ccw(c-1486.19,1392.5) -1476.54,1392.5 ; U8.41@-1479.36,1385.67 ccw(c-1486.19,1392.5) -1476.54,1392.5 ; -1476.54,1392.5 ccw(c-1466.88,1392.5) U8.41@-1473.71,1385.67 ; -1476.54,1392.5 ccw(c-1466.88,1392.5) U8.41@-1473.71,1385.67 ; -1476.54,1392.5 ccw(c-1466.88,1392.5) U8.41@-1473.71,1385.67 ; -1476.54,1392.5 ccw(c-1466.88,1392.5) U8.41@-1473.71,1385.67 ; -1476.54,1392.5 ccw(c-1466.88,1392.5) U8.41@-1473.71,1385.67 ; -1476.54,1392.5 ccw(c-1466.88,1392.5) U8.41@-1473.71,1385.67 ; -1398.52,1550.85 cw(c-1383.54,1535.87) v2@-1383.54,1557.06 ; -1398.52,1550.85 ccw(c-1413.51,1565.84) v2@-1392.31,1565.84 ; -1398.52,1550.85 cw(c-1383.54,1535.87) v2@-1383.54,1557.06 ; -1398.52,1550.85 ccw(c-1413.51,1565.84) v2@-1392.31,1565.84 ; -1398.52,1550.85 cw(c-1383.54,1535.87) v2@-1383.54,1557.06 ; -1398.52,1550.85 ccw(c-1413.51,1565.84) v2@-1392.31,1565.84 ; -1398.52,1550.85 ccw(c-1413.51,1565.84) v2@-1392.31,1565.84 ; -1398.52,1550.85 cw(c-1383.54,1535.87) v2@-1383.54,1557.06 ; -1398.52,1550.85 ccw(c-1413.51,1565.84) v2@-1392.31,1565.84 ; -1398.52,1550.85 cw(c-1383.54,1535.87) v2@-1383.54,1557.06 ; -1398.52,1550.85 ccw(c-1413.51,1565.84) v2@-1392.31,1565.84 ; -1398.52,1550.85 cw(c-1383.54,1535.87) v2@-1383.54,1557.06 ; -973.52,1822.83 cw(c-988.51,1807.84) v2@-967.31,1807.84 ; -973.52,1822.83 ccw(c-958.54,1837.82) v2@-958.54,1816.62 ; -973.52,1822.83 cw(c-988.51,1807.84) v2@-967.31,1807.84 ; -973.52,1822.83 ccw(c-958.54,1837.82) v2@-958.54,1816.62 ; -973.52,1822.83 cw(c-988.51,1807.84) v2@-967.31,1807.84 ; -973.52,1822.83 ccw(c-958.54,1837.82) v2@-958.54,1816.62 ; -973.52,1822.83 cw(c-988.51,1807.84) v2@-967.31,1807.84 ; -973.52,1822.83 ccw(c-958.54,1837.82) v2@-958.54,1816.62 ; -973.52,1822.83 cw(c-988.51,1807.84) v2@-967.31,1807.84 ; -973.52,1822.83 ccw(c-958.54,1837.82) v2@-958.54,1816.62 ; -973.52,1822.83 ccw(c-958.54,1837.82) v2@-958.54,1816.62 ; -973.52,1822.83 cw(c-988.51,1807.84) v2@-967.31,1807.84 ; -973.52,1822.83 ccw(c-958.54,1837.82) v2@-958.54,1816.62 ; -973.52,1822.83 cw(c-988.51,1807.84) v2@-967.31,1807.84 ; -973.52,1822.83 ccw(c-958.54,1837.82) v2@-958.54,1816.62 ; -973.52,1822.83 cw(c-988.51,1807.84) v2@-967.31,1807.84 ; -973.52,1822.83 ccw(c-958.54,1837.82) v2@-958.54,1816.62 ; -973.52,1822.83 cw(c-988.51,1807.84) v2@-967.31,1807.84
  BottomLayer w10: v2(-1383.54,1565.84) -1275.54,1565.84 -1033.54,1807.84 v2(-958.54,1807.84) ; v2@-1377.33,1559.63 cw(c-1362.34,1544.65) -1362.34,1565.84 ; v2@-1377.33,1559.63 cw(c-1362.34,1544.65) -1362.34,1565.84 ; v2@-1377.33,1559.63 cw(c-1362.34,1544.65) -1362.34,1565.84 ; v2@-1377.33,1559.63 cw(c-1362.34,1544.65) -1362.34,1565.84 ; v2@-1377.33,1559.63 cw(c-1362.34,1544.65) -1362.34,1565.84 ; v2@-1377.33,1559.63 cw(c-1362.34,1544.65) -1362.34,1565.84 ; v2@-1377.33,1559.63 cw(c-1362.34,1544.65) -1362.34,1565.84 ; v2@-1377.33,1559.63 cw(c-1362.34,1544.65) -1362.34,1565.84 ; v2@-1377.33,1559.63 cw(c-1362.34,1544.65) -1362.34,1565.84 ; v2@-1377.33,1572.05 ccw(c-1362.34,1587.04) -1362.34,1565.84 ; v2@-1377.33,1572.05 ccw(c-1362.34,1587.04) -1362.34,1565.84 ; v2@-1377.33,1572.05 ccw(c-1362.34,1587.04) -1362.34,1565.84 ; v2@-1377.33,1572.05 ccw(c-1362.34,1587.04) -1362.34,1565.84 ; v2@-1377.33,1572.05 ccw(c-1362.34,1587.04) -1362.34,1565.84 ; v2@-1377.33,1572.05 ccw(c-1362.34,1587.04) -1362.34,1565.84 ; v2@-1377.33,1572.05 ccw(c-1362.34,1587.04) -1362.34,1565.84 ; v2@-1377.33,1572.05 ccw(c-1362.34,1587.04) -1362.34,1565.84 ; v2@-1377.33,1572.05 ccw(c-1362.34,1587.04) -1362.34,1565.84 ; -979.73,1807.84 cw(c-979.73,1786.65) v2@-964.74,1801.63 ; -979.73,1807.84 ccw(c-979.73,1829.04) v2@-964.74,1814.05 ; -979.73,1807.84 cw(c-979.73,1786.65) v2@-964.74,1801.63 ; -979.73,1807.84 ccw(c-979.73,1829.04) v2@-964.74,1814.05 ; -979.73,1807.84 cw(c-979.73,1786.65) v2@-964.74,1801.63 ; -979.73,1807.84 ccw(c-979.73,1829.04) v2@-964.74,1814.05 ; -979.73,1807.84 cw(c-979.73,1786.65) v2@-964.74,1801.63 ; -979.73,1807.84 ccw(c-979.73,1829.04) v2@-964.74,1814.05 ; -979.73,1807.84 cw(c-979.73,1786.65) v2@-964.74,1801.63 ; -979.73,1807.84 ccw(c-979.73,1829.04) v2@-964.74,1814.05 ; -979.73,1807.84 ccw(c-979.73,1829.04) v2@-964.74,1814.05 ; -979.73,1807.84 cw(c-979.73,1786.65) v2@-964.74,1801.63 ; -979.73,1807.84 ccw(c-979.73,1829.04) v2@-964.74,1814.05 ; -979.73,1807.84 cw(c-979.73,1786.65) v2@-964.74,1801.63 ; -979.73,1807.84 ccw(c-979.73,1829.04) v2@-964.74,1814.05 ; -979.73,1807.84 cw(c-979.73,1786.65) v2@-964.74,1801.63 ; -979.73,1807.84 ccw(c-979.73,1829.04) v2@-964.74,1814.05 ; -979.73,1807.84 cw(c-979.73,1786.65) v2@-964.74,1801.63
Encoder_A: EXP1.6 U8.11 | length 2281.7
  TopLayer w10: v2(-1639.54,935.84) U8.11@-1639.54,977.84 ; v2(-797.54,728.84) -328.54,728.84 -274.54,674.84 ; v2@-791.33,722.63 cw(c-776.34,707.65) -776.34,728.84 cw(c-776.34,750.04) v2@-791.33,735.05 ; EXP1.6@-251.86,660.98 ccw(c-274.53,649.37) -274.53,674.84 ; EXP1.6@-251.86,688.71 cw(c-274.53,700.31) -274.53,674.84 ; EXP1.6@-224.77,674.84 -274.54,674.84 ; v2@-1645.74,942.05 ccw(c-1660.73,957.04) -1639.54,957.04 ; v2@-1645.74,942.05 ccw(c-1660.73,957.04) -1639.54,957.04 ; v2@-1645.74,942.05 ccw(c-1660.73,957.04) -1639.54,957.04 ; v2@-1645.74,942.05 ccw(c-1660.73,957.04) -1639.54,957.04 ; v2@-1645.74,942.05 ccw(c-1660.73,957.04) -1639.54,957.04 ; v2@-1645.74,942.05 ccw(c-1660.73,957.04) -1639.54,957.04 ; v2@-1645.74,942.05 ccw(c-1660.73,957.04) -1639.54,957.04 ; v2@-1645.74,942.05 ccw(c-1660.73,957.04) -1639.54,957.04 ; v2@-1645.74,942.05 ccw(c-1660.73,957.04) -1639.54,957.04 ; U8.11@-1642.36,975.01 cw(c-1649.19,968.19) -1639.54,968.19 ; U8.11@-1642.36,975.01 cw(c-1649.19,968.19) -1639.54,968.19 ; U8.11@-1642.36,975.01 cw(c-1649.19,968.19) -1639.54,968.19 ; U8.11@-1642.36,975.01 cw(c-1649.19,968.19) -1639.54,968.19 ; U8.11@-1642.36,975.01 cw(c-1649.19,968.19) -1639.54,968.19 ; U8.11@-1642.36,975.01 cw(c-1649.19,968.19) -1639.54,968.19 ; U8.11@-1642.36,975.01 cw(c-1649.19,968.19) -1639.54,968.19 ; U8.11@-1642.36,975.01 cw(c-1649.19,968.19) -1639.54,968.19 ; U8.11@-1642.36,975.01 cw(c-1649.19,968.19) -1639.54,968.19 ; -1639.54,957.04 ccw(c-1618.34,957.04) v2@-1633.33,942.05 ; -1639.54,957.04 ccw(c-1618.34,957.04) v2@-1633.33,942.05 ; -1639.54,957.04 ccw(c-1618.34,957.04) v2@-1633.33,942.05 ; -1639.54,957.04 ccw(c-1618.34,957.04) v2@-1633.33,942.05 ; -1639.54,957.04 ccw(c-1618.34,957.04) v2@-1633.33,942.05 ; -1639.54,957.04 ccw(c-1618.34,957.04) v2@-1633.33,942.05 ; -1639.54,957.04 ccw(c-1618.34,957.04) v2@-1633.33,942.05 ; -1639.54,957.04 ccw(c-1618.34,957.04) v2@-1633.33,942.05 ; -1639.54,957.04 ccw(c-1618.34,957.04) v2@-1633.33,942.05 ; -1639.54,968.19 cw(c-1629.88,968.19) U8.11@-1636.71,975.01 ; -1639.54,968.19 cw(c-1629.88,968.19) U8.11@-1636.71,975.01 ; -1639.54,968.19 cw(c-1629.88,968.19) U8.11@-1636.71,975.01 ; -1639.54,968.19 cw(c-1629.88,968.19) U8.11@-1636.71,975.01 ; -1639.54,968.19 cw(c-1629.88,968.19) U8.11@-1636.71,975.01 ; -1639.54,968.19 cw(c-1629.88,968.19) U8.11@-1636.71,975.01 ; -1639.54,968.19 cw(c-1629.88,968.19) U8.11@-1636.71,975.01 ; -1639.54,968.19 cw(c-1629.88,968.19) U8.11@-1636.71,975.01 ; -1639.54,968.19 cw(c-1629.88,968.19) U8.11@-1636.71,975.01
  BottomLayer w10: v2(-1639.54,935.84) -1639.54,807.84 -1605.54,773.84 -1420.54,773.84 -1355.54,708.84 -817.54,708.84 v2(-797.54,728.84) ; v2@-806.31,728.84 cw(c-827.51,728.84) -812.52,713.85 cw(c-797.54,698.87) v2@-797.54,720.06 ; -1639.54,914.65 cw(c-1618.34,914.65) -1633.33,929.63 ccw(c-1618.34,914.65) -1639.54,914.65 ; -1639.54,914.65 ccw(c-1660.73,914.65) -1645.74,929.63 cw(c-1660.73,914.65) -1639.54,914.65